# Altium PCB PCB_Test.PcbDoc
Units mm, origin at the board's own origin, x right, y up, seen from the top; angles counter-clockwise.
Board outline 95 x 40 mm, 2 copper layers (Top Layer, Bottom Layer); 21 components, 8 nets, 43 pads, 12 vias.
Unrouted connection lines stored in the file: 31.
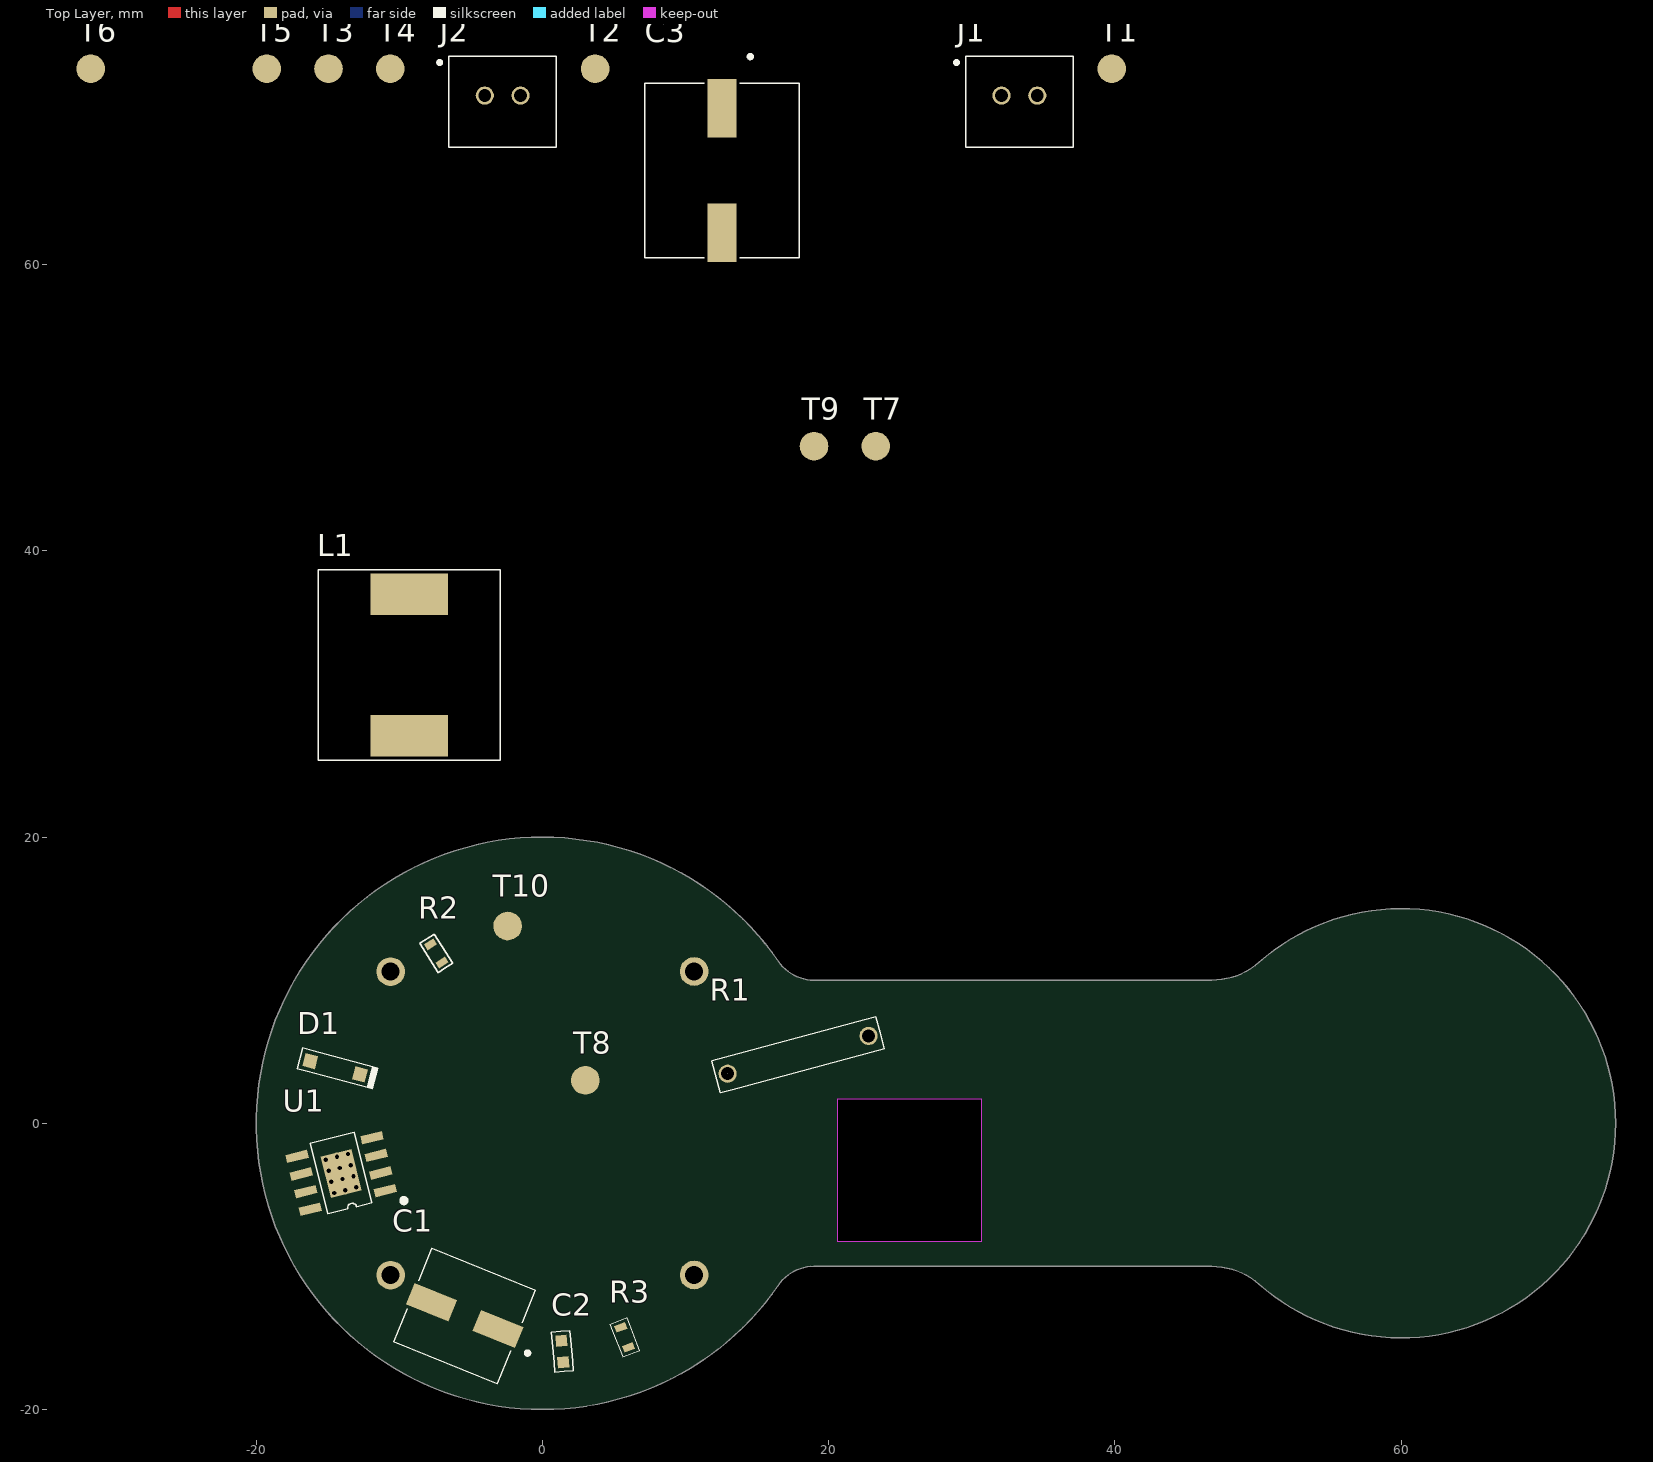
[diagram p0: Top Layer view]
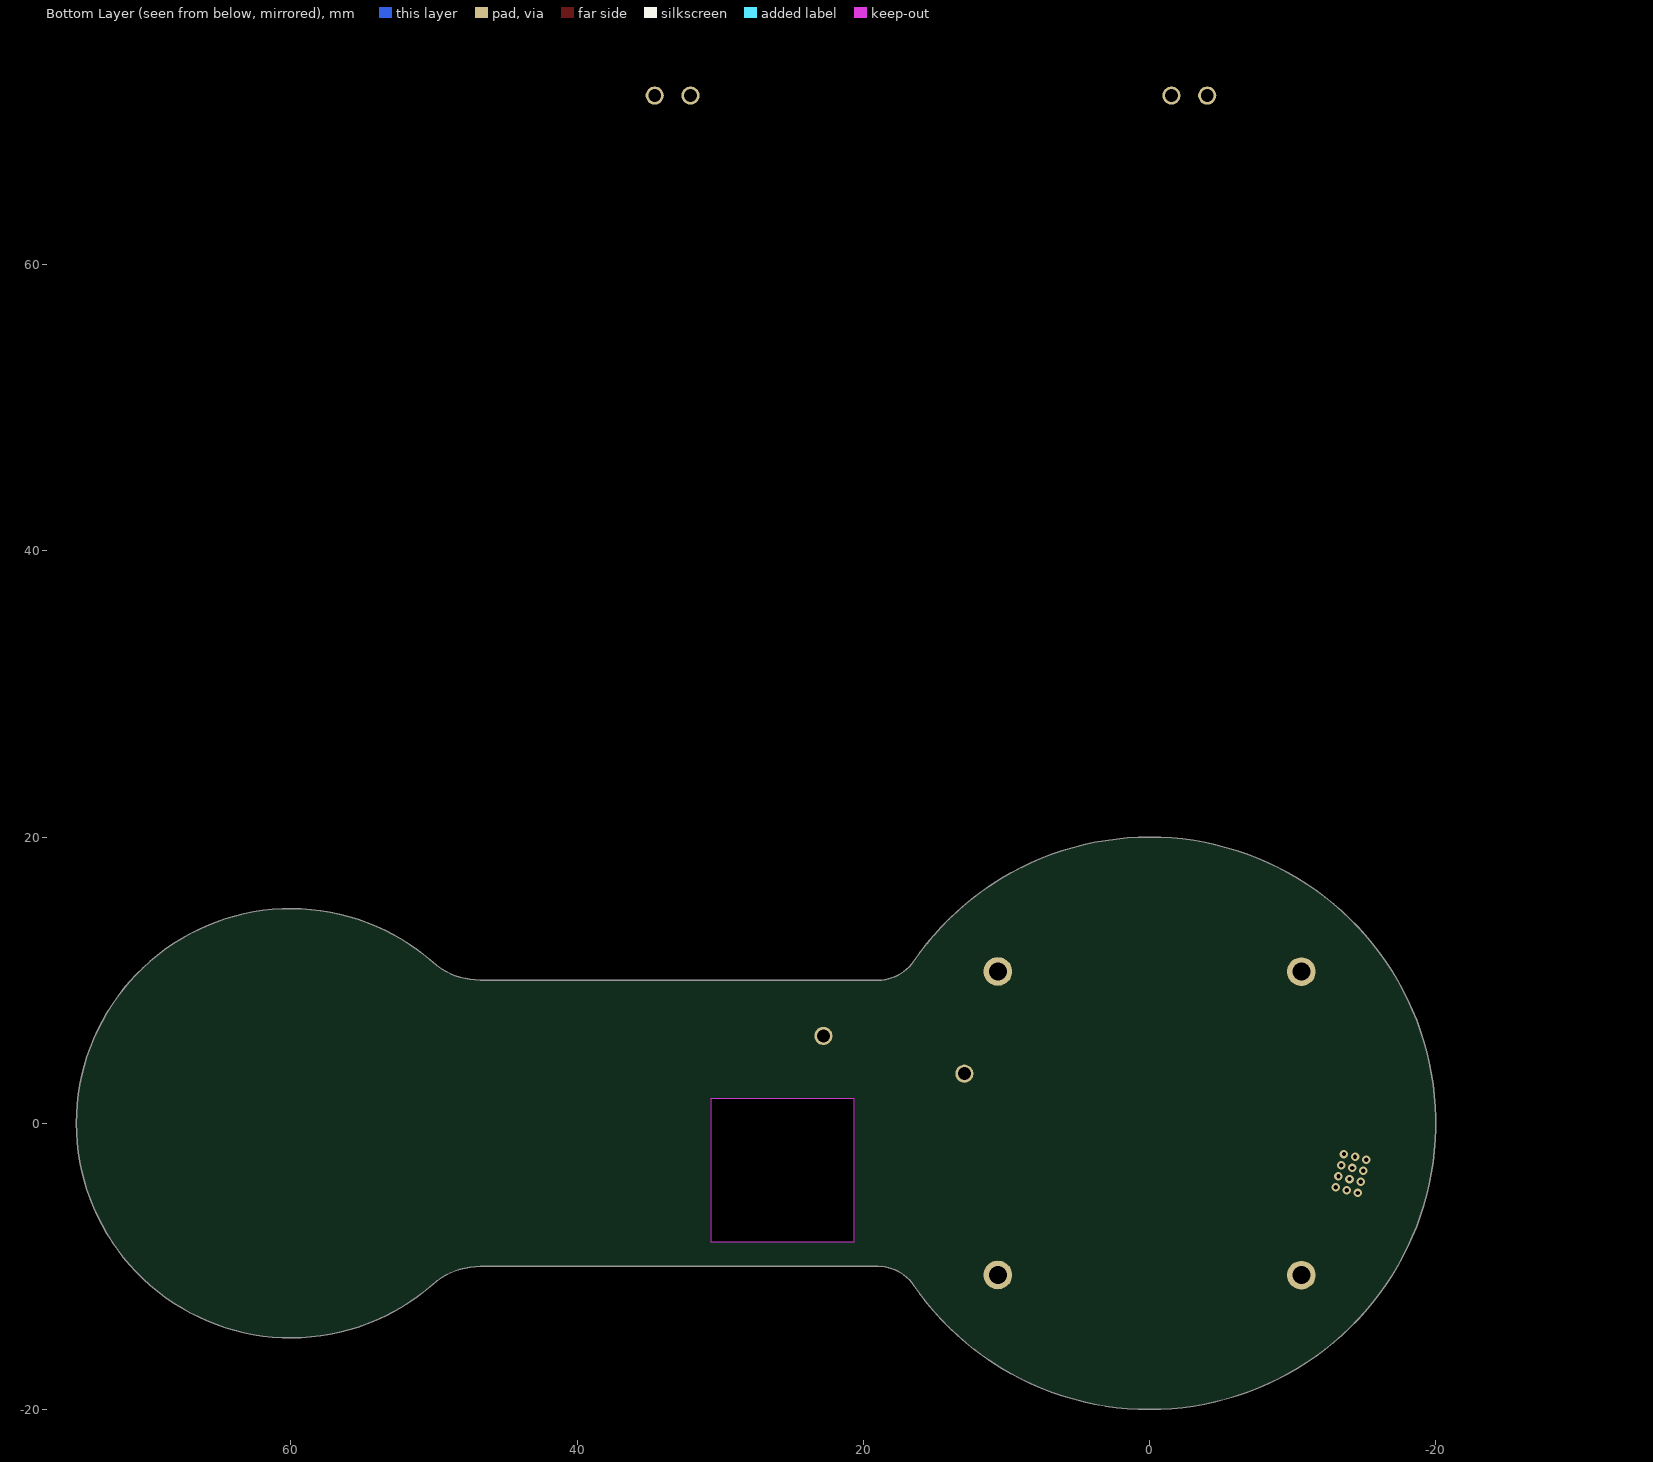
[diagram p1: Bottom Layer view, seen from below]

## Layer stack, top to bottom
Top Solder: solder mask 0.0102, Solder Resist, Dk 3.5
Top Layer: signal copper 0.0356
Dielectric 1: dielectric 0.32, FR-4, Dk 4.8
Bottom Layer: signal copper 0.0356
Bottom Solder: solder mask 0.0102, Solder Resist, Dk 3.5

## Board outline
16.496,-11.301 cw(c-0.003,0.003) 16.496,11.307 ccw(c18.971,13.003) 18.971,10.003 46.769,10.003 ccw(c46.769,15.003) 50.076,11.253 cw(c59.997,0.003) 50.076,-11.247 ccw(c46.769,-14.997) 46.769,-9.997 18.971,-9.997 ccw(c18.971,-12.997)
cut-out: 20.65,-8.277 20.65,1.723 30.65,1.723 30.65,-8.277

## Design rules (kind name [scope] priority, off if disabled: settings)
Clearance [All] p1: gap=0.254 ignorepadtopadclearanceinfootprint=FALSE except(0: Arc-Hole Track-Hole SMDPad-Hole THPad-Hole Via-Hole Fill-Hole Poly-Hole Region-Hole Text-Hole)
PolygonConnect [All] p1: connectstyle=Relief reliefconductorwidth=0.254 reliefentries=4 polygonreliefangle="90 Angle" airgapwidth=0.254
RoutingVias [All] p1: holewidth=0.711 width=1.27 viastyle="Through Hole" minholewidth=0.711 minwidth=1.27 maxholewidth=0.711 maxwidth=1.27
SolderMaskExpansion [All] p1: expansion=0.102 istentingtop=FALSE
Width [All] p1: maxlimit=0.254 minlimit=0.254 preferedwidth=0.254
30 further rules are at their usual default settings.

## Components (designator, comment, footprint, x,y, rotation, side; value= is the part's Value field where it differs from the comment)
C1 "EEEFK1C101P" EEE-FK1C101P -5.432,-13.444 r337.96 top
C2 "885012006012" 885012006012 1.394,-15.939 r275 top
C3 "EEEFK1E471P" EEE-FK1E471P 12.55,66.59 r90 top
D1 "1N5819" 1N5819 -14.489,3.882 r345 top
J1 "B2B-EH-A(LF)(SN)" B2B-EH-A(LF)(SN) 33.329,71.82 r0 top
J2 "B2B-EH-A(LF)(SN)" B2B-EH-A(LF)(SN) -2.78,71.82 r0 top
L1 "74477120" 74477120_Inductor -9.3,32.03 r0 top
R1 "H826R1BZA" H826R1BZA 17.87,4.788 r15 top value=26.1R
R2 "KTR03EZPF6201" KTR03EZPF6201 -7.419,11.873 r122 top value=6.2kR
R3 "SDR03EZPJ202" SDR03EZPJ202 5.734,-14.937 r291 top
T1 "Test Pad" "Test Point" 39.789,73.7 r0 top
T2 "Test Pad" "Test Point" 3.68,73.7 r0 top
T3 "Test Pad" "Test Point" -14.95,73.7 r0 top
T4 "Test Pad" "Test Point" -10.63,73.7 r0 top
T5 "Test Pad" "Test Point" -19.27,73.7 r0 top
T6 "Test Pad" "Test Point" -31.57,73.7 r0 top
T7 "Test Pad" "Test Point" 23.29,47.32 r0 top
T8 "Test Pad" "Test Point" 3,3 r0 top
T9 "Test Pad" "Test Point" 18.98,47.32 r0 top
T10 "Test Pad" "Test Point" -2.431,13.787 r100 top
U1 "MC34063ADR" MC34063ADR -14.069,-3.508 r194 top

## Footprints (in the part's own frame and the unit in brackets; to place one, negate y for a bottom-side part, rotate by r counter-clockwise, add the part's x,y. Pads: shape width x height; smd on the part's side, far side on the other; paste and mask are expansions set on the pad)
1N5819 [mm] "SOD_23"
  rect 0.9x0.95 smd: 1(-1.8,0) 2(1.8,0)
  silkscreen extent -2.55,-0.75 2.9,0.75, body extent -1.8,-0.78 1.85,0.78, height 1.5
74477120_Inductor [mm]
  rect 5.4x2.9 smd: 1(0,4.95) 2(0,-4.95)
  silkscreen extent -6.35,-6.65 6.35,6.65, body extent -6.15,-6.15 6.15,6.15, height 6.12
885012006012 [mm] "CAP_0603"
  rect 0.8x0.8 smd: 1(-0.75,0) 2(0.75,0)
  silkscreen extent -1.4,-0.65 1.4,0.65, body extent -0.8,-0.4 0.8,0.4, height 0.8
B2B-EH-A(LF)(SN) [mm] "JST 2-PIN CONN"
  round 1.27 hole 0.9: 1(-1.25,0) 2(1.25,0)
  silkscreen extent -4.51,-3.6 3.75,2.74, body extent -3.59,-3.35 3.59,2.49, height 7.26
EEE-FK1C101P [mm] "PANASONIC_CAP_AE_D"
  rect 3.2x1.6 smd: 1(-2.5,0) 2(2.5,0)
  silkscreen extent -3.9,-3.55 5.18,3.5, body extent -3.65,-3.3 3.65,3.3, height 5.83
EEE-FK1E471P [mm] "CAP_AE_G (ø10x10.2L)"
  rect 4.1x2 smd: 1(-4.35,0) 2(4.35,0)
  silkscreen extent -6.1,-5.4 8.08,5.4, body extent -5.85,-5.15 5.85,5.15, height 10.2
H826R1BZA [mm] "RES_TH"
  round 1.27 hole 0.9: 1(-5.1,0) 2(5.1,0)
  silkscreen extent -5.96,-1.16 5.94,1.16, body extent -5.4,-1.16 5.36,1.16, height 2.93
KTR03EZPF6201 [mm] "RES_0603"
  rect 0.5x0.8 smd: 1(-0.75,0) 2(0.75,0)
  silkscreen extent -1.2,-0.6 1.2,0.6, body extent -0.85,-0.44 0.85,0.44, height 0.56
MC34063ADR [mm] "SOP_8"
  rect 1.55x0.6 smd: 1(-2.7,1.905) 2(-2.7,0.635) 3(-2.7,-0.635) 4(-2.7,-1.905) 5(2.7,-1.905) 6(2.7,-0.635) 7(2.7,0.635) 8(2.7,1.905)
  rect 2.2x3 smd: 9(0,0)
  silkscreen extent -3.95,-2.57 1.6,3.05, body extent -3,-2.45 3,2.45, height 1.75
SDR03EZPJ202 [mm] "RES_0603"
  rect 0.5x0.8 smd: 1(-0.725,0) 2(0.775,0)
  silkscreen extent -1.2,-0.63 1.25,0.63, body extent -0.78,-0.4 0.83,0.4, height 0.55
"Test Point" [mm]
  round 2 smd: 1(0,0)

## Part data
C1: "Cap Aluminum 100uF 16V 20% (6.3 X 5.8mm) SMD 240mA 2000 hr 105°C T/R", Manufacturer=Panasonic, Supplier Part Number=667-EEE-FK1C101P, Category="Aluminum Electrolytic Capacitors", ComponentLink1Description=https://datasheet.ciiva.com/19479/1357482-19479360.pdf?src-supplier=Jameco, ComponentLink1URL=https://datasheet.ciiva.com/19479/1357482-19479360.pdf?src-supplier=Jameco, ComponentLink2Description=https://datasheet.ciiva.com/11777/0900766b80e4e8b0-11777237.pdf?src-supplier=Rs, ComponentLink2URL=https://datasheet.ciiva.com/11777/0900766b80e4e8b0-11777237.pdf?src-supplier=Rs, ComponentLink3Description=https://datasheet.ciiva.com/29313/443464-da-01-en-smd-elko-vfk-d-100-uf-16v-29313488.pdf?src-supplier=Conrad, ComponentLink3URL=https://datasheet.ciiva.com/29313/443464-da-01-en-smd-elko-vfk-d-100-uf-16v-29313488.pdf?src-supplier=Conrad, ComponentLink4Description=https://datasheet.ciiva.com/16449/aba0000ce120-16449534.pdf?src-supplier=Future+Electronics, ComponentLink4URL=https://datasheet.ciiva.com/16449/aba0000ce120-16449534.pdf?src-supplier=Future+Electronics, ComponentLink5Description=https://datasheet.ciiva.com/24022/aba0000ce120-24022554.pdf?src-supplier=Mouser, ComponentLink5URL=https://datasheet.ciiva.com/24022/aba0000ce120-24022554.pdf?src-supplier=Mouser, ComponentLink6Description=https://datasheet.ciiva.com/43463/58258-43463495.pdf?src-supplier=Farnell, ComponentLink6URL=https://datasheet.ciiva.com/43463/58258-43463495.pdf?src-supplier=Farnell, ComponentLink7Description=https://datasheet.ciiva.com/2983/aba0000ce120-2983939.pdf?src-supplier=Avnet, ComponentLink7URL=https://datasheet.ciiva.com/2983/aba0000ce120-2983939.pdf?src-supplier=Avnet, ComponentLink8Description=https://datasheet.ciiva.com/30177/aba0000ce120-30177788.pdf?src-supplier=Onlinecomponents.com, ComponentLink8URL=https://datasheet.ciiva.com/30177/aba0000ce120-30177788.pdf?src-supplier=Onlinecomponents.com, ComponentLink9Description=https://datasheet.ciiva.com/14601/70255214-14601005.pdf?src-supplier=Allied+Electronics, ComponentLink9URL=https://datasheet.ciiva.com/14601/70255214-14601005.pdf?src-supplier=Allied+Electronics, ComponentLink10Description=https://datasheet.ciiva.com/46387/1676921-46387918.pdf?src-supplier=Element14, ComponentLink10URL=https://datasheet.ciiva.com/46387/1676921-46387918.pdf?src-supplier=Element14, ComponentLink11Description=https://datasheet.ciiva.com/46376/1676921-46376425.pdf?src-supplier=Element14, ComponentLink11URL=https://datasheet.ciiva.com/46376/1676921-46376425.pdf?src-supplier=Element14, Manufacturer Part Number=EEEFK1C101P, Pricing="1=0.45, 10=0.243, 50=0.243, 100=0.211, 1000=0.125, 10000=0.106 (USD)", RoHS=Yes, Stock=76012, Supplier=Mouser
C2: "Ceramic Capacitor 470pF, 10VDC, 0603, ±5 %", Manufacturer="Wurth Electronics", Supplier Part Number=732-7756-1-ND, Category="Ceramic Capacitors", ComponentLink1Description=http://www.farnell.com/datasheets/2546579.pdf?src-supplier=Farnell, ComponentLink1URL=http://www.farnell.com/datasheets/2546579.pdf?src-supplier=Farnell, ComponentLink2Description=https://katalog.we-online.de/pbs/datasheet/885012006012.pdf?src-supplier=Digi-Key, ComponentLink2URL=https://katalog.we-online.de/pbs/datasheet/885012006012.pdf?src-supplier=Digi-Key, ComponentLink3Description=http://www.farnell.com/datasheets/2546579.pdf?src-supplier=Newark, ComponentLink3URL=http://www.farnell.com/datasheets/2546579.pdf?src-supplier=Newark, Manufacturer Part Number=885012006012, Pricing="1=0.1, 10=0.044, 100=0.039, 500=0.035 (USD)", RoHS=Yes, Stock=15812, Supplier=Digi-Key
C3: "CAP ALUM 470UF 20% 25V SMD", Manufacturer=Panasonic, Supplier Part Number=667-EEE-FK1E471P, Category="Aluminum Electrolytic Capacitors", ComponentLink1Description=https://datasheet.ciiva.com/11777/0900766b80e4e8b0-11777352.pdf?src-supplier=Rs, ComponentLink1URL=https://datasheet.ciiva.com/11777/0900766b80e4e8b0-11777352.pdf?src-supplier=Rs, ComponentLink2Description=https://datasheet.ciiva.com/29313/443472-da-01-en-smd-elko-vfk-g-470-uf-25v-29313562.pdf?src-supplier=Conrad, ComponentLink2URL=https://datasheet.ciiva.com/29313/443472-da-01-en-smd-elko-vfk-g-470-uf-25v-29313562.pdf?src-supplier=Conrad, ComponentLink3Description=https://datasheet.ciiva.com/46376/1676921-46376477.pdf?src-supplier=Element14, ComponentLink3URL=https://datasheet.ciiva.com/46376/1676921-46376477.pdf?src-supplier=Element14, ComponentLink4Description=https://datasheet.ciiva.com/46381/1676921-46381499.pdf?src-supplier=Element14, ComponentLink4URL=https://datasheet.ciiva.com/46381/1676921-46381499.pdf?src-supplier=Element14, ComponentLink5Description=https://datasheet.ciiva.com/46381/58258-46381500.pdf?src-supplier=Element14, ComponentLink5URL=https://datasheet.ciiva.com/46381/58258-46381500.pdf?src-supplier=Element14, ComponentLink6Description=https://datasheet.ciiva.com/16432/aba0000ce120-16432909.pdf?src-supplier=Future+Electronics, ComponentLink6URL=https://datasheet.ciiva.com/16432/aba0000ce120-16432909.pdf?src-supplier=Future+Electronics, Manufacturer Part Number=EEEFK1E471P, Pricing="1=0.97, 10=0.67, 50=0.67, 100=0.505, 1000=0.328, 10000=0.318 (USD)", RoHS=Yes, Stock=24677, Supplier=Mouser
D1: "1N5819 Series Low Drop Power 1 A 40 V Schottky Rectifier Through Hole - DO-41", Manufacturer="Taiwan Semiconductor", Supplier Part Number=1801-1N5819CT-ND, Category="Schottky Diodes", ComponentLink1Description=https://datasheet.ciiva.com/26338/155370-da-01-en-schottky-diode-1-n-5819-tsc-do-41-26338776.pdf?src-supplier=Conrad, ComponentLink1URL=https://datasheet.ciiva.com/26338/155370-da-01-en-schottky-diode-1-n-5819-tsc-do-41-26338776.pdf?src-supplier=Conrad, ComponentLink2Description=https://datasheet.ciiva.com/26309/ql600260-600262-e-26309355.pdf?src-supplier=Distrelec, ComponentLink2URL=https://datasheet.ciiva.com/26309/ql600260-600262-e-26309355.pdf?src-supplier=Distrelec, ComponentLink3Description=https://datasheet.ciiva.com/24491/1n581720series-c10-24491580.pdf?src-supplier=Onlinecomponents.com, ComponentLink3URL=https://datasheet.ciiva.com/24491/1n581720series-c10-24491580.pdf?src-supplier=Onlinecomponents.com, Manufacturer Part Number=1N5819, Pricing="1=0.49, 10=0.399, 100=0.2719, 500=0.20392, 1000=0.15294, 2000=0.1402 (USD)", RoHS=Yes, Stock=2706, Supplier=Digi-Key
J1 J2: "CONN HEADER EH TOP 2POS 2.5MM", Manufacturer=JST, Category="Headers and Wire Housings", ComponentLink1Description=https://datasheet.ciiva.com/26924/getdatasheetpartid-639961-26924027.pdf?src-supplier=Verical, ComponentLink1URL=https://datasheet.ciiva.com/26924/getdatasheetpartid-639961-26924027.pdf?src-supplier=Verical, ComponentLink2Description=https://datasheet.ciiva.com/11746/0900766b805aab1f-11746167.pdf?src-supplier=Rs, ComponentLink2URL=https://datasheet.ciiva.com/11746/0900766b805aab1f-11746167.pdf?src-supplier=Rs, ComponentLink3Description=https://datasheet.ciiva.com/41451/001217319-da-01-en-stiftleiste-gerade-2-pol-rm-25mm-41451366.pdf?src-supplier=Conrad, ComponentLink3URL=https://datasheet.ciiva.com/41451/001217319-da-01-en-stiftleiste-gerade-2-pol-rm-25mm-41451366.pdf?src-supplier=Conrad, ComponentLink4Description=https://datasheet.ciiva.com/712/eeh-712441.pdf?src-supplier=Digi-Key, ComponentLink4URL=https://datasheet.ciiva.com/712/eeh-712441.pdf?src-supplier=Digi-Key, ComponentLink5Description=https://datasheet.ciiva.com/16449/b2b-eh-alfsn-16449468.pdf?src-supplier=Future+Electronics, ComponentLink5URL=https://datasheet.ciiva.com/16449/b2b-eh-alfsn-16449468.pdf?src-supplier=Future+Electronics, Manufacturer Part Number=B2B-EH-A(LF)(SN), Pricing="1=0.1297, 10=0.0976, 25=0.0965, 50=0.0955, 100=0.0702, 500=0.0452 (USD)", RoHS=Yes, Stock=19411, Supplier="Arrow Electronics", Supplier Part Number=B2B-EH-A(LF)(SN)
L1: "Power Choke Shielded Wirewound 100uH 20% 1KHz Ferrite 1.53A 160mOhm DCR T/R", Manufacturer="Wurth Electronics", Supplier Part Number=3338500P, Category="Fixed Inductors", ComponentLink1Description=https://datasheet.ciiva.com/1052/74477120-1052278.pdf?src-supplier=Digi-Key, ComponentLink1URL=https://datasheet.ciiva.com/1052/74477120-1052278.pdf?src-supplier=Digi-Key, ComponentLink2Description=https://datasheet.ciiva.com/4954/74477120-29022-4954590.pdf?src-supplier=Mouser, ComponentLink2URL=https://datasheet.ciiva.com/4954/74477120-29022-4954590.pdf?src-supplier=Mouser, ComponentLink3Description=https://datasheet.ciiva.com/11799/0900766b80bbd134-11799893.pdf?src-supplier=Rs, ComponentLink3URL=https://datasheet.ciiva.com/11799/0900766b80bbd134-11799893.pdf?src-supplier=Rs, ComponentLink4Description=https://datasheet.ciiva.com/1052/74477120-1052279.pdf?src-supplier=Digi-Key, ComponentLink4URL=https://datasheet.ciiva.com/1052/74477120-1052279.pdf?src-supplier=Digi-Key, ComponentLink5Description=https://datasheet.ciiva.com/1052/74477120-1052280.pdf?src-supplier=Digi-Key, ComponentLink5URL=https://datasheet.ciiva.com/1052/74477120-1052280.pdf?src-supplier=Digi-Key, ComponentLink6Description=https://datasheet.ciiva.com/26308/rl74477120-data-de-26308263.pdf?src-supplier=Distrelec, ComponentLink6URL=https://datasheet.ciiva.com/26308/rl74477120-data-de-26308263.pdf?src-supplier=Distrelec, ComponentLink7Description=https://datasheet.ciiva.com/48691/001087759-da-01-ml-we-pd-smd-speicherdrossel-74477120-de-en-48691212.pdf?src-supplier=Conrad, ComponentLink7URL=https://datasheet.ciiva.com/48691/001087759-da-01-ml-we-pd-smd-speicherdrossel-74477120-de-en-48691212.pdf?src-supplier=Conrad, Manufacturer Part Number=74477120, RoHS=Yes, Stock=1, Supplier=Rs
R1: "Metal Film Resistors - Through Hole H8 26R1 0.1% 100PPM", Case/Package=Axial, Manufacturer="TE Connectivity", Max Operating Temperature=155°C, Max Power Dissipation=250mW, Min Operating Temperature=-55°C, Number of Resistors=1, Package Quantity=250, Resistor Type="Thin Film", Supplier Part Number=H826R1BZA-ND, Temperature Coefficient=100ppm/°C, Tolerance=0.1%, Voltage Rating=350V, Category=Uncategorized, ComponentLink1Description=https://datasheet.ciiva.com/12654/eng-ds-1773230-g-12654485.pdf?src-supplier=Mouser, ComponentLink1URL=https://datasheet.ciiva.com/12654/eng-ds-1773230-g-12654485.pdf?src-supplier=Mouser, Diameter=2.5mm, ELV=Compliant, Length=7.2mm, Manufacturer Part Number=H826R1BZA, Mounting Technology=Axial, Number of Terminations=2, Packaging=Bulk, Power Rating=250mW, Pricing="500=0.61476 (USD)", RoHS=Yes, RoHS Compliant=Yes, Series="Holco, Holsworthy", Supplier=Digi-Key, Termination=Axial, Weight=0.008466oz
R2: "Res High Voltage 0603 6.2K Ohm 1/10W 1% SMD", Case Code (Imperial)=0603, Case Code (Metric)=1608, Manufacturer=Rohm, Max Operating Temperature=155°C, Max Power Dissipation=100mW, Min Operating Temperature=-55°C, Ratings=AEC-Q200, Supplier Part Number=RHM6.2KAYCT-ND, Temperature Coefficient=100ppm/°C, Tolerance=1%, Case/Package=0603, Category="Chip SMD Resistors", ComponentLink1Description=https://datasheet.ciiva.com/14928/ktr-14928509.pdf?src-supplier=Digi-Key, ComponentLink1URL=https://datasheet.ciiva.com/14928/ktr-14928509.pdf?src-supplier=Digi-Key, ComponentLink2Description=https://datasheet.ciiva.com/14930/ktr-14930279.pdf?src-supplier=Digi-Key, ComponentLink2URL=https://datasheet.ciiva.com/14930/ktr-14930279.pdf?src-supplier=Digi-Key, ComponentLink3Description=https://datasheet.ciiva.com/14924/ktr-14924957.pdf?src-supplier=Digi-Key, ComponentLink3URL=https://datasheet.ciiva.com/14924/ktr-14924957.pdf?src-supplier=Digi-Key, Features="Automotive AEC-Q200", Manufacturer Part Number=KTR03EZPF6201, Number of Terminations=2, Packaging="Cut Tape", Pricing="1=0.16, 10=0.133, 50=0.0702, 100=0.0521, 500=0.03152, 1000=0.02182 (USD)", RoHS=Yes, RoHS Compliant=Yes, Series=KTR, Stock=7098, Supplier=Digi-Key
R3: "Res Thick Film 0603 2K Ohm 5% 0.3W ±200ppm/C Pad SMD Automotive T/R", Manufacturer=Rohm, Supplier Part Number=511-1749-1-ND, Category="Chip SMD Resistors", ComponentLink1Description=https://www.rohm.com/datasheet/SDR03EZPJ/sdr-e?src-supplier=Digi-Key, ComponentLink1URL=https://www.rohm.com/datasheet/SDR03EZPJ/sdr-e?src-supplier=Digi-Key, Manufacturer Part Number=SDR03EZPJ202, Pricing="1=0.1, 10=0.092, 50=0.0494, 100=0.0354, 500=0.02192, 1000=0.01555 (USD)", RoHS=Yes, RoHS Compliant=Yes, Stock=27252, Supplier=Digi-Key
T1 T2 T3 T4 T5 T6 T7 T8 T9 T10: library part Test_Pad
U1: "Buck, Boost Switching Regulator IC Positive or Negative Adjustable 1.25V 1 Output 1.5A (Switch) 8-SOIC (0.154, 3.90mm Width)", Manufacturer="Texas Instruments", Supplier Part Number=595-MC34063ADR, Category="Voltage Regulators - Switching", ComponentLink1Description=https://datasheet.ciiva.com/7408/1862376-7408060.pdf?src-supplier=Newark, ComponentLink1URL=https://datasheet.ciiva.com/7408/1862376-7408060.pdf?src-supplier=Newark, ComponentLink2Description=https://datasheet.ciiva.com/2025/mc33063a-2025161.pdf?src-supplier=Digi-Key, ComponentLink2URL=https://datasheet.ciiva.com/2025/mc33063a-2025161.pdf?src-supplier=Digi-Key, ComponentLink3Description=https://datasheet.ciiva.com/2025/mc33063a-2025162.pdf?src-supplier=Digi-Key, ComponentLink3URL=https://datasheet.ciiva.com/2025/mc33063a-2025162.pdf?src-supplier=Digi-Key, ComponentLink4Description=https://datasheet.ciiva.com/2025/mc33063a-2025163.pdf?src-supplier=Digi-Key, ComponentLink4URL=https://datasheet.ciiva.com/2025/mc33063a-2025163.pdf?src-supplier=Digi-Key, Manufacturer Part Number=MC34063ADR, Pricing="1=0.71, 10=0.591, 50=0.591, 100=0.448, 1000=0.305, 10000=0.247 (USD)", RoHS=Yes, Stock=38934, Supplier=Mouser

## Free pads (board coordinates)
  round 2 hole 1.27: 1(-10.61,10.6) 3(10.6,10.61) 4(-10.61,-10.61) 5(10.6,-10.6)

## Via types
v1: diameter 0.6, hole 0.3, Top Layer to Bottom Layer, 12 vias

## Nets (pads, with @x,y where several pads share a name; then routed paths per layer and width w, separated by ;. In a path a pad name is that pad's centre, name@x,y a point inside that pad or via, vN(x,y) a via of type N, cw(c..) or ccw(c..) an arc to the next point about the centre after c; other vN are vias at no path point)
5V: C3.2 J2.1 T4.1
12V: C1.2 J1.1 R1.1 T1.1 T5.1 U1.6
CII: R2.1 R3.2 T6.1 U1.5
GND: C1.1 C2.1 C3.1 D1.2 J1.2 J2.2 R2.2 T7.1 T8.1 T9.1 T10.1 U1.4 U1.9
  other v1: -14.555,-4.866 -13.779,-4.672 -13.003,-4.479 -14.749,-4.09 -13.973,-3.896 -13.196,-3.702 -14.942,-3.313 -14.166,-3.12 -13.39,-2.926 -15.136,-2.537 -14.36,-2.344 -13.583,-2.15
IN_Signal: R1.2 T2.1 U1.1 U1.7 U1.8
NetC2_2: C2.2 U1.3
NetL1_2: L1.2 R3.1
SE: D1.1 L1.1 T3.1 U1.2

## Silkscreen, mask and mechanical layers (free items; w line width, h text height)
Mechanical 1:
  circle w0.013: c-0.003,0.003 r15
  circle w0.013: c51.512,-8.482 r1.5
  circle w0.013: c68.483,-8.482 r1.5
  circle w0.013: c51.512,8.488 r1.5
  circle w0.013: c68.483,8.488 r1.5
  circle w0.013: c10.604,-10.604 r1.5
  circle w0.013: c-10.609,-10.604 r1.5
  circle w0.013: c-10.609,10.61 r1.5
  circle w0.013: c10.604,10.61 r1.5
  circle w0.013: c59.997,0.003 r12
  lines w0.013: -14.145,-14.139 -0.003,0.003 ; -14.145,14.145 -0.003,0.003 ; -5.003,0.003 -0.003,0.003 ; -0.003,-4.997 -0.003,0.003 ; -0.003,5.003 -0.003,0.003 ; 4.997,0.003 -0.003,0.003 ; 14.14,-14.139 -0.003,0.003 ; 14.14,14.145 -0.003,0.003 ; 45.855,-14.139 59.997,0.003 ; 45.855,14.145 59.997,0.003 ; 54.997,0.003 59.997,0.003 ; 59.997,-4.997 59.997,0.003 ; 59.997,5.003 59.997,0.003 ; 64.997,0.003 59.997,0.003 ; 74.14,-14.139 59.997,0.003 ; 74.14,14.145 59.997,0.003 ; 18.971,-9.997 ccw(c18.971,-12.997) 16.496,-11.301 cw(c-0.003,0.003) 16.496,11.307 ccw(c18.971,13.003) 18.971,10.003 ; 18.971,-9.997 46.769,-9.997 ; 18.971,-9.997 46.769,10.003 ; 18.971,-9.997 18.971,10.003 ; 18.971,10.003 46.769,10.003 ; 18.971,10.003 46.769,-9.997 ; 46.769,-9.997 cw(c46.769,-14.997) 50.076,-11.247 ccw(c59.997,0.003) 50.076,11.253 cw(c46.769,15.003) 46.769,10.003 ; 46.769,-9.997 46.769,10.003 ; 20.65,-8.277 20.65,1.723 30.65,1.723 30.65,-8.277 20.65,-8.277